# EAGLE board driver_Dio Faziko Pratama(Line Follower) (EAGLE 9.6.2)
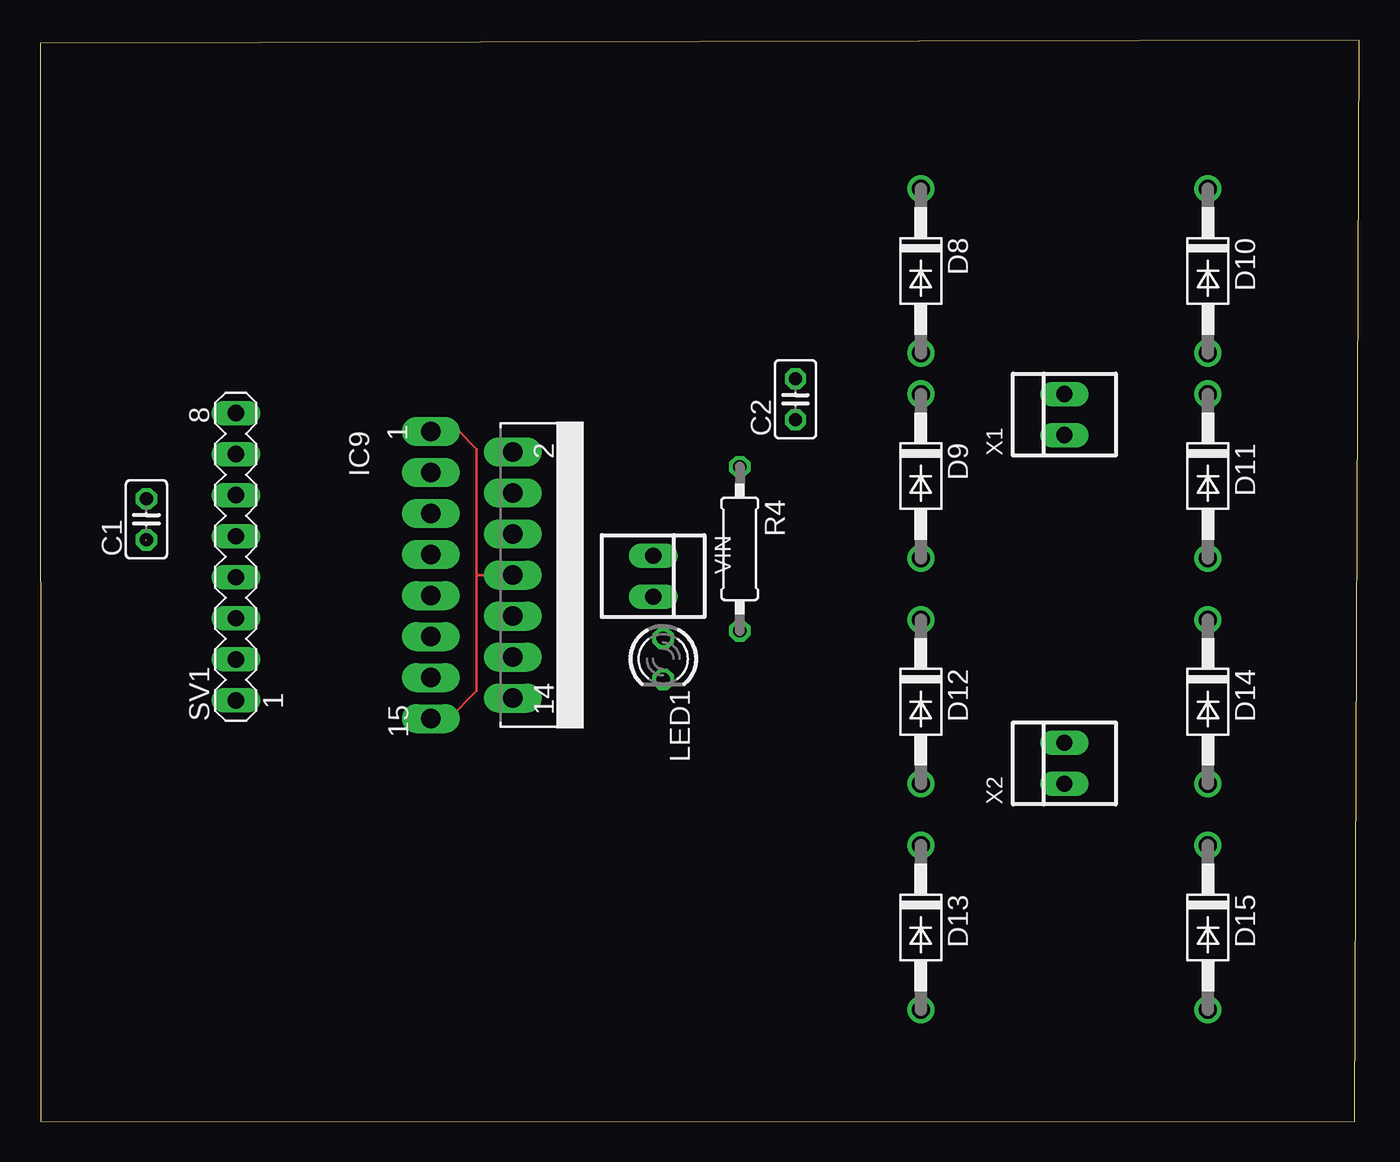
[diagram p0: board, top side]
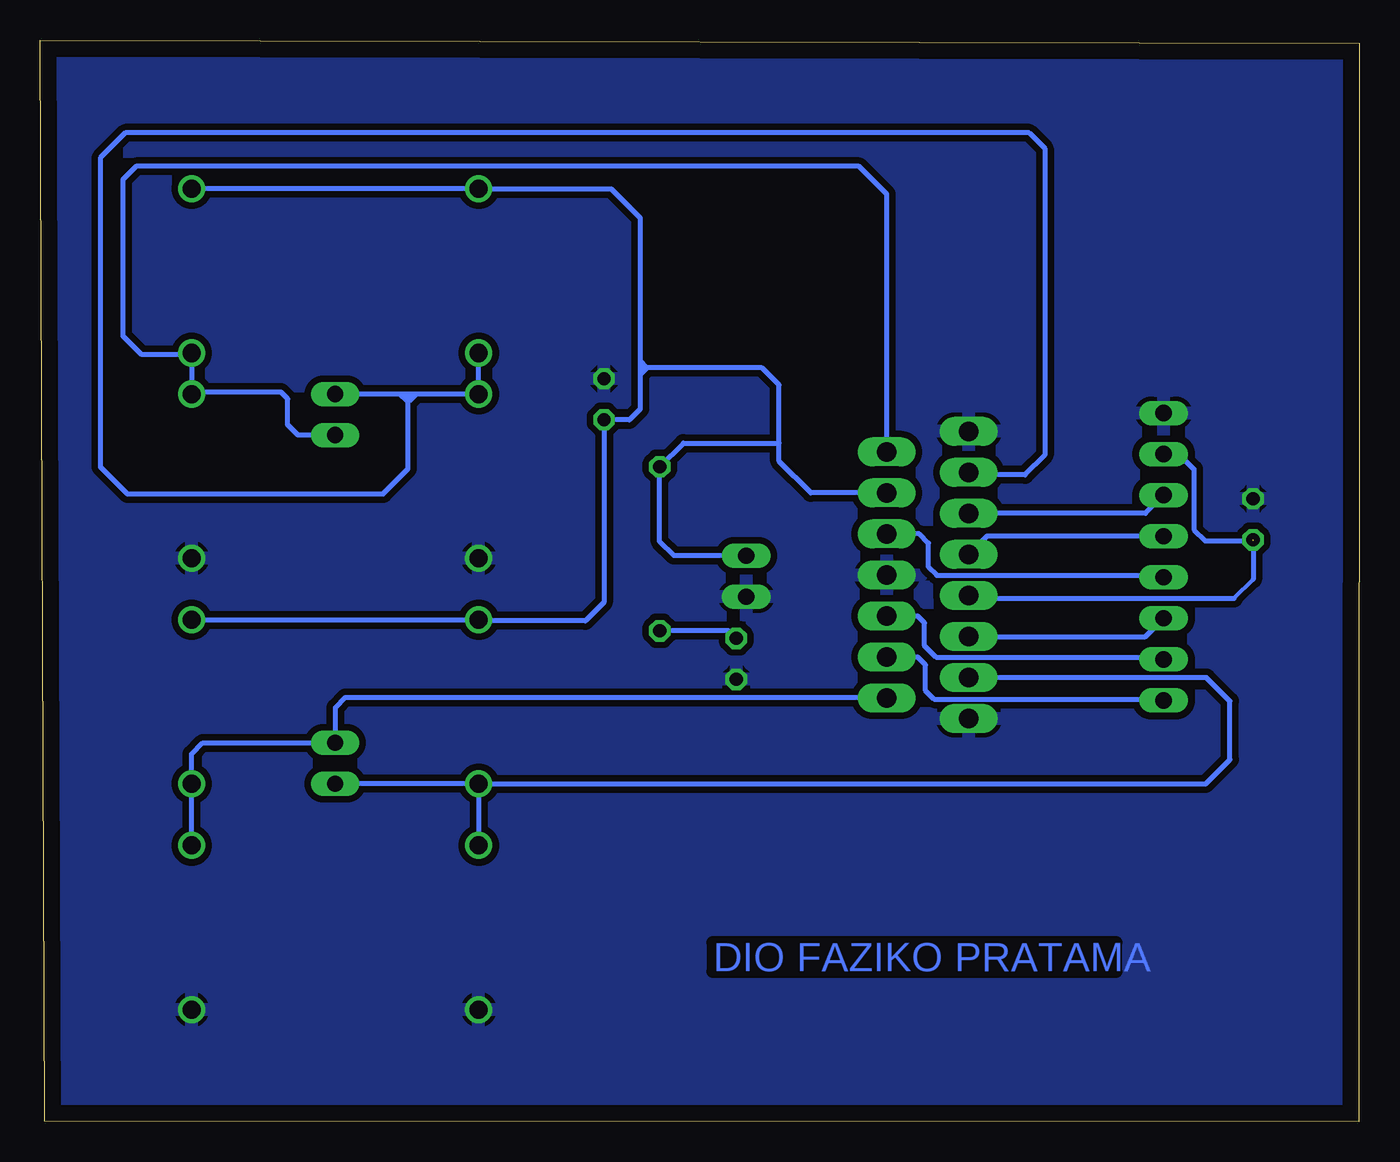
[diagram p1: board, bottom side, seen from below]

Size 81.65 x 66.92 mm. Coordinates in mm from the lower left corner, seen from the top.
Outline: 0.03,0 81.37,0.03 81.66,66.92 0,66.74 0.03,0
Copper layers (1*16): Top 0.035mm / dielectric 1.5mm / Bottom 0.035mm
Design rules "default": minimum track width 6mil, minimum drill 0.35mm, track to track 6mil, track to pad 6mil, pad to pad 6mil, via to via 6mil, smd to smd 6mil, copper to edge 40mil, drill to drill 6mil, minimum pad ring 10mil, minimum via ring 8mil, stop-mask expansion 4mil, vias tented up to drill 0mil, thermal gap 10mil

## Footprints (pad centres in the part's own frame; a part is rotated, then mirrored left to right if it is on the bottom)
C025-025X050 = drill 0.813 octagon: 1 -1.27,0; 2 1.27,0
DO41-10 = drill 1.118: A 5.08,0; C -5.08,0
MULTIWATT-15 = drill 1.2 long: 1 -8.89,-7.62; 2 -7.62,-2.54; 3 -6.35,-7.62; 4 -5.08,-2.54; 5 -3.81,-7.62; 6 -2.54,-2.54; 7 -1.27,-7.62; 8 0,-2.54; 9 1.27,-7.62; 10 2.54,-2.54; 11 3.81,-7.62; 12 5.08,-2.54; 13 6.35,-7.62; 14 7.62,-2.54; 15 8.89,-7.62
LED3MM = drill 0.813 octagon: A -1.27,0; K 1.27,0
0207/10 = drill 0.813 octagon: 1 -5.08,0; 2 5.08,0
MA08-1 = drill 1.016 long: 1 -8.89,0; 2 -6.35,0; 3 -3.81,0; 4 -1.27,0; 5 1.27,0; 6 3.81,0; 7 6.35,0; 8 8.89,0
22-23-2021 = drill 1 long: 1 -1.27,0; 2 1.27,0

## Placement (x,y rotation side)
C1  100nF  [C025-025X050]  6.57,37.28 90 top
C2  100nF  [C025-025X050]  46.76,44.71 90 top
D8  1N4004  [DO41-10]  54.51,52.65 270 top
D9  1N4004  [DO41-10]  54.51,39.95 270 top
D10  1N4004  [DO41-10]  72.29,52.65 270 top
D11  1N4004  [DO41-10]  72.29,39.95 270 top
D12  1N4004  [DO41-10]  54.51,25.98 270 top
D13  1N4004  [DO41-10]  54.51,12.01 270 top
D14  1N4004  [DO41-10]  72.29,25.98 270 top
D15  1N4004  [DO41-10]  72.29,12.01 270 top
IC9  L298  [MULTIWATT-15]  31.79,33.83 270 top
LED1  [LED3MM]  38.56,28.64 270 top
R4  330  [0207/10]  43.31,35.45 270 top
SV1  [MA08-1]  12.11,34.96 90 top
VIN  22-23-2021  [22-23-2021]  37.94,33.76 270 top
X1  22-23-2021  [22-23-2021]  63.4,43.76 90 top
X2  22-23-2021  [22-23-2021]  63.4,22.17 90 top

## Library data of the parts
C1 C2 R4 = rcl
D8-D15 = diode
IC9 = st-microelectronics
LED1 = led
SV1 = con-lstb; OC_FARNELL: unknown; OC_NEWARK: unknown
VIN X1 X2 = con-molex; MF: MOLEX; MPN: 22-23-2021; OC_FARNELL: 1462926; OC_NEWARK: 25C3832

## Nets
GND: C1.2 C2.2 D9.A D11.A D13.A D15.A IC9.1 IC9.8 IC9.15 LED1.K SV1.8 VIN.2
N$1: IC9.5 SV1.6
N$3: IC9.7 SV1.5
N$5: IC9.12 SV1.1
N$8: IC9.10 SV1.2
N$16: IC9.6 SV1.4
N$17: IC9.11 SV1.3
N$44: LED1.A R4.2
N$204: D8.A D9.C IC9.3 X1.2
N$205: D10.A D11.C IC9.2 X1.1
N$206: D12.A D13.C IC9.13 X2.1
N$207: D14.A D15.C IC9.14 X2.2
VCC: C1.1 IC9.9 SV1.7
VDD: C2.1 D8.C D10.C D12.C D14.C IC9.4 R4.1 VIN.1

## Tracks (layer width: path | path; a pad name or v marks a point on that pad's centre or on a via)
GND
  Top 0.152: IC9.15 25.3,24.94 27.02,26.66 27.02,33.62 27.02,33.83 | 27.02,33.83 27.22,33.83 27.23,33.83 IC9.8 | IC9.1 25.91,42.72 27.02,41.62 27.02,34.05 27.02,33.83
  pour Bottom (isolate 0.406): 0.05,0.45 81.54,0.45 81.54,66.73 -0.02,66.73
N$1
  Bottom 0.305: SV1.6 13.24,37.64 IC9.5
N$3
  Bottom 0.305: SV1.5 23.04,36.23 IC9.7
N$5
  Bottom 0.152: SV1.1 12.19,26.15
  Bottom 0.305: 12.19,26.15 26.33,26.15 26.85,26.68 26.85,28.27 27.33,28.75 IC9.12
N$8
  Bottom 0.305: SV1.2 12.24,28.75 26.2,28.75 26.9,29.45 26.9,30.88 27.32,31.29 IC9.10
N$16
  Bottom 0.305: SV1.4 12.22,33.81 26.15,33.81 26.66,34.32 26.66,35.8 27.24,36.37 IC9.6
N$17
  Bottom 0.305: IC9.11 13.24,30.02 SV1.3
N$44
  Bottom 0.305: LED1.A 39.03,30.37 R4.2
N$204
  Bottom 0.152: IC9.3 24.21,40.22 | 19.46,60.24 19.42,60.2 | 58.89,44.85 59.07,45.03
  Bottom 0.305: D8.A D9.C 58.39,45.03 | 58.39,45.03 59.07,45.03 59.4,45.03 | 59.4,45.03 X1.2 | 58.89,44.59 58.89,40.4 60.43,38.86 76.28,38.86 77.94,40.52 77.94,59.66 76.4,61.2 20.42,61.2 19.46,60.24 19.46,41.26 20.69,40.03 24.01,40.03 IC9.3 | 58.89,44.59 58.89,44.85 | 58.39,45.03 58.83,44.59 58.89,44.59 | 58.89,44.59 58.96,44.59 59.4,45.03
N$205
  Bottom 0.152: 66.35,44.71 66.33,44.73 | 72.18,45.14 D11.C | D10.A 72.29,47.5
  Bottom 0.305: X1.1 65.71,42.49 66.35,43.14 66.35,44.71 | 66.33,44.73 66.75,45.14 72.18,45.14 | D11.C 72.29,47.5 75.42,47.5 76.56,48.64 76.56,58.3 75.73,59.13 30.97,59.13 29.25,57.41 IC9.2
N$206
  Bottom 0.305: D12.A X2.1 | D12.A D13.C | D12.A 9.5,20.9 8,22.41 8,26.03 9.45,27.48 IC9.13
N$207
  Bottom 0.152: 62.74,26.29 62.78,26.25
  Bottom 0.305: D15.C D14.A 72.29,22.75 71.6,23.44 X2.2 63.4,25.63 62.78,26.25 29.29,26.25 IC9.14
VCC  (1 unrouted)
  Bottom 0.152: IC9.9 23.99,32.38 | 6.63,35.94 C1.1
  Bottom 0.254: 6.57,33.56 7.75,32.38
  Bottom 0.305: 23.99,32.38 7.75,32.38 | SV1.7 11.16,41.31 10.23,40.38 10.23,36.63 9.54,35.94 6.63,35.94 | 6.57,35.94 6.57,33.56
VDD
  Bottom 0.152: D12.C 54.61,31.06 54.55,31
  Bottom 0.305: D14.C 54.61,31.06 | D10.C D8.C 46.31,57.73 44.51,55.93 44.51,47.08 | 54.55,31 47.91,31 46.76,32.15 C2.1 45.18,43.44 44.51,44.1 44.51,46.23 | 44.51,47.08 44.51,46.66 | 44.51,46.66 44.51,46.23 | IC9.4 33.95,38.91 35.92,40.88 35.92,41.99 | 35.92,41.99 35.92,45.6 36.98,46.66 44.08,46.66 | 44.51,46.66 44.08,46.66 | 35.92,41.99 41.85,41.99 R4.1 43.3,35.9 42.44,35.03 VIN.1 | 44.08,46.66 44.51,46.23 | 44.08,46.66 44.51,47.08

## Text on the board
Bottom: DIO FAZIKO PRATAMA